# Allegro board DAVID_LUCA_2023_PACT_N8_rev2.brd
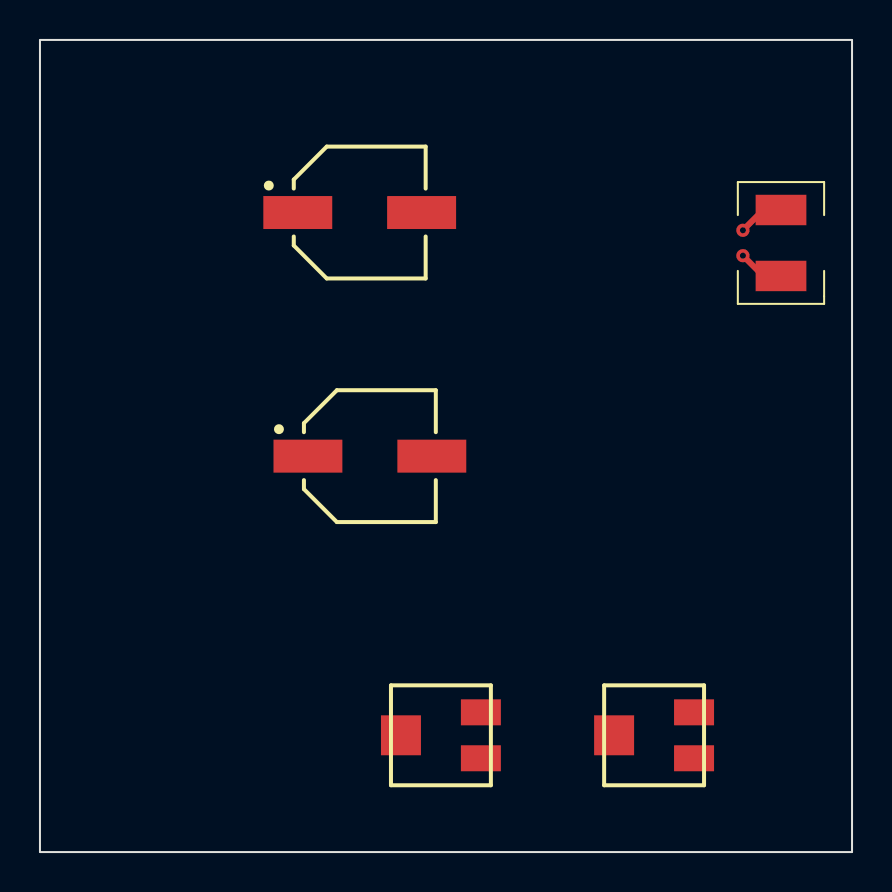
[diagram p0: board, top side]
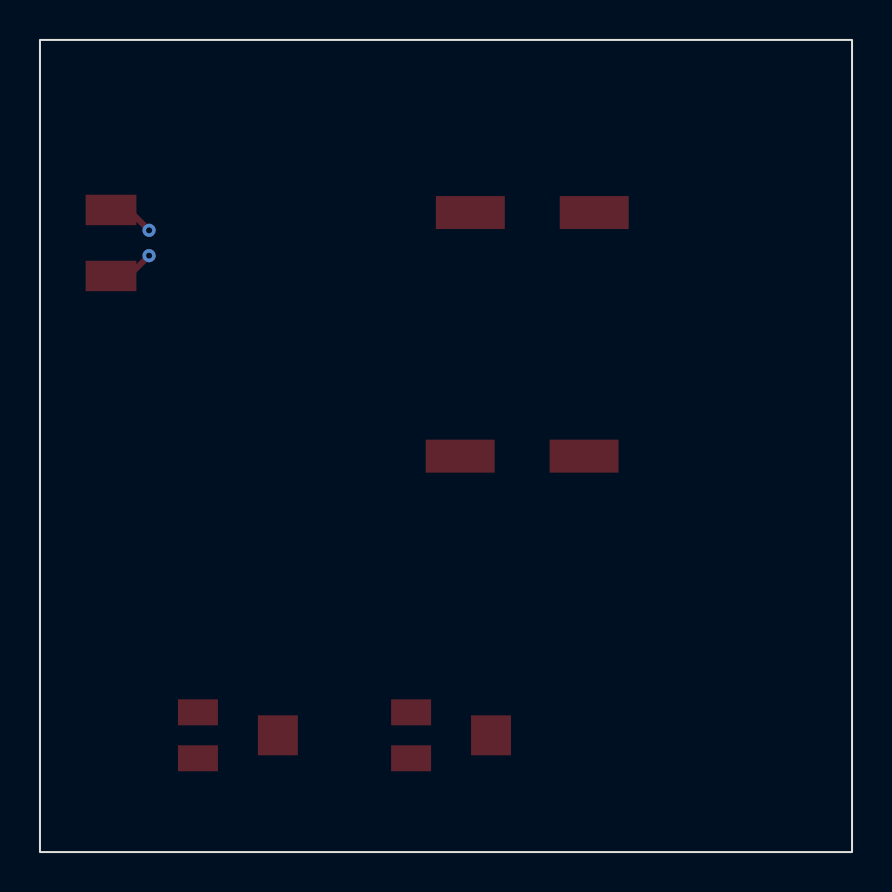
[diagram p1: board, bottom side, seen from below]

Outline 40.64 x 40.64 mm; copper layers: TOP, BOTTOM. Coordinates in mm from the lower left corner of the outline.
Outline path: rectangle 0,0 40.64,40.64

## Design rules (mm)
constraint set DEFAULT: min track width 0.127

## Placement (name value [footprint] x y rotation side)
C5  10u  [CAPAE660X770N]  16 32 0 top
C6  10u  [CAPAE660X770N]  16.51 19.81 0 top
J2  CON2  [1210RF_WV_12D]  37.08 30.48 270 top
P1  50K  [TRIM_BI_23AN]  30.73 5.84 0 top
P2  100k  [TRIM_BI_23AN]  20.07 5.84 0 top

## Library data of the parts
C5 C6 = CAP POL
J2 = CON2
P1 P2 = POT

## Footprints (pads in the part's own frame, mm; a bottom-side part is the same pattern mirrored in y, then rotated)
1210RF_WV_12D
  rect 1.524x2.54 smd: 1(-1.651,0) 2(1.651,0)
CAPAE660X770N
  rect 3.45x1.65 smd: 1(-3.1,0) 2(3.1,0)
TRIM_BI_23AN
  rect 2x1.3 smd: 1(2,1.15) 2(2,-1.15)
  rect 2x2 smd: 3(-2,0)

## Nets
0: C5.2 J2.1
N56942: J2.2
N57064: P1.1
N57080: P1.3
N57114: P1.2(T)
N57408: C6.1
N57458: P2.2(T)
N57528: C6.2
N57592: C5.1
N57998: P2.3
N58004: P2.1

## Via types
v1: diameter 0.66, hole 0.305, TOP to BOTTOM, 2 vias

## Routing (per net, layer and track width the routed paths; a pad name or vN(x,y) marks a point on that pad's centre or on a via; arc(x,y) is an arc through that point)
0: length 2.3
  TOP w0.305: J2.1 36.2,32.13 v1(35.18,31.11)
N56942: length 2.3
  TOP w0.305: v1(35.18,29.84) 36.2,28.83 J2.2
